# Altium PCB PCB1.PcbDoc
Units mil, origin at the board's own origin, x right, y up, seen from the top; angles counter-clockwise.
Board outline 10000 x 8000 mil, 2 copper layers (Top Layer, Bottom Layer); 40 components, 29 nets, 128 pads, 3 vias.
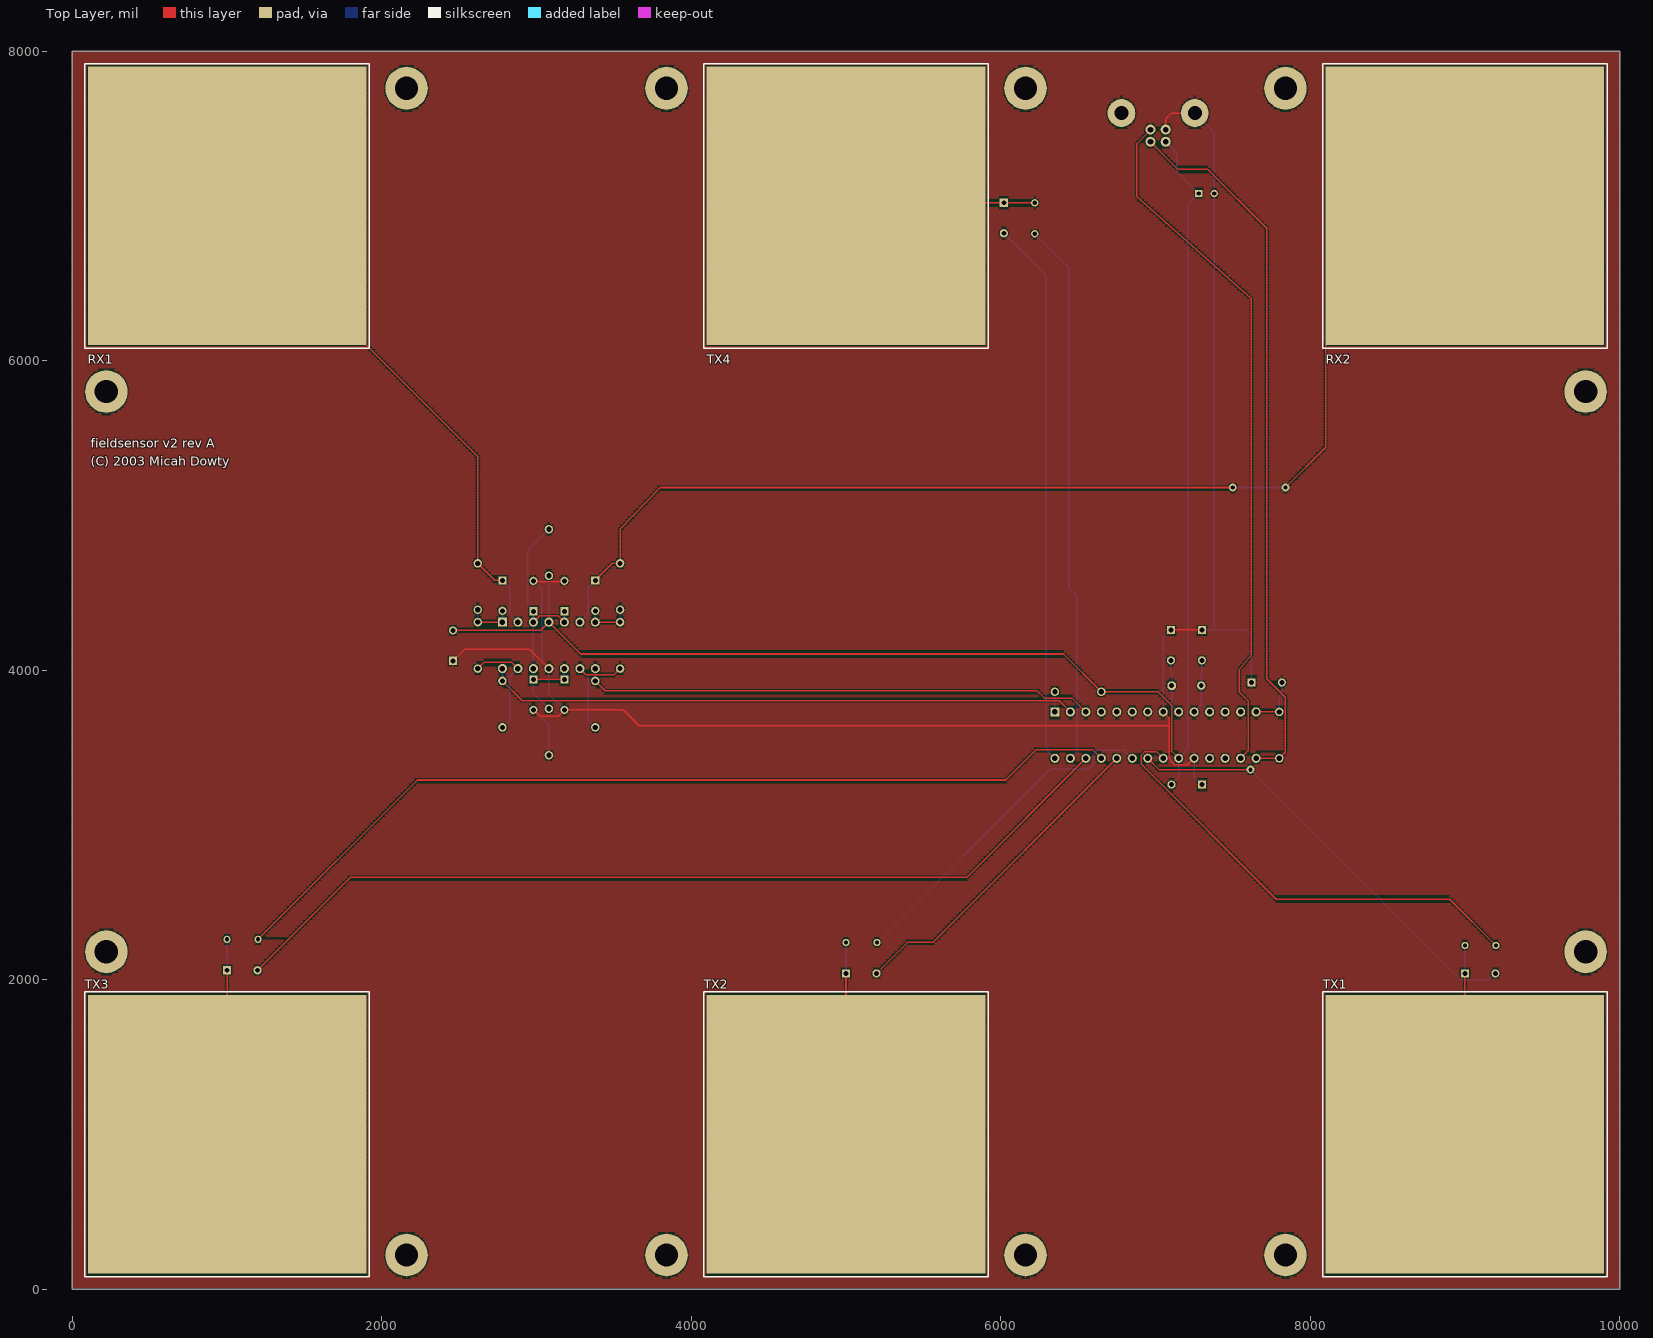
[diagram p0: Top Layer view]
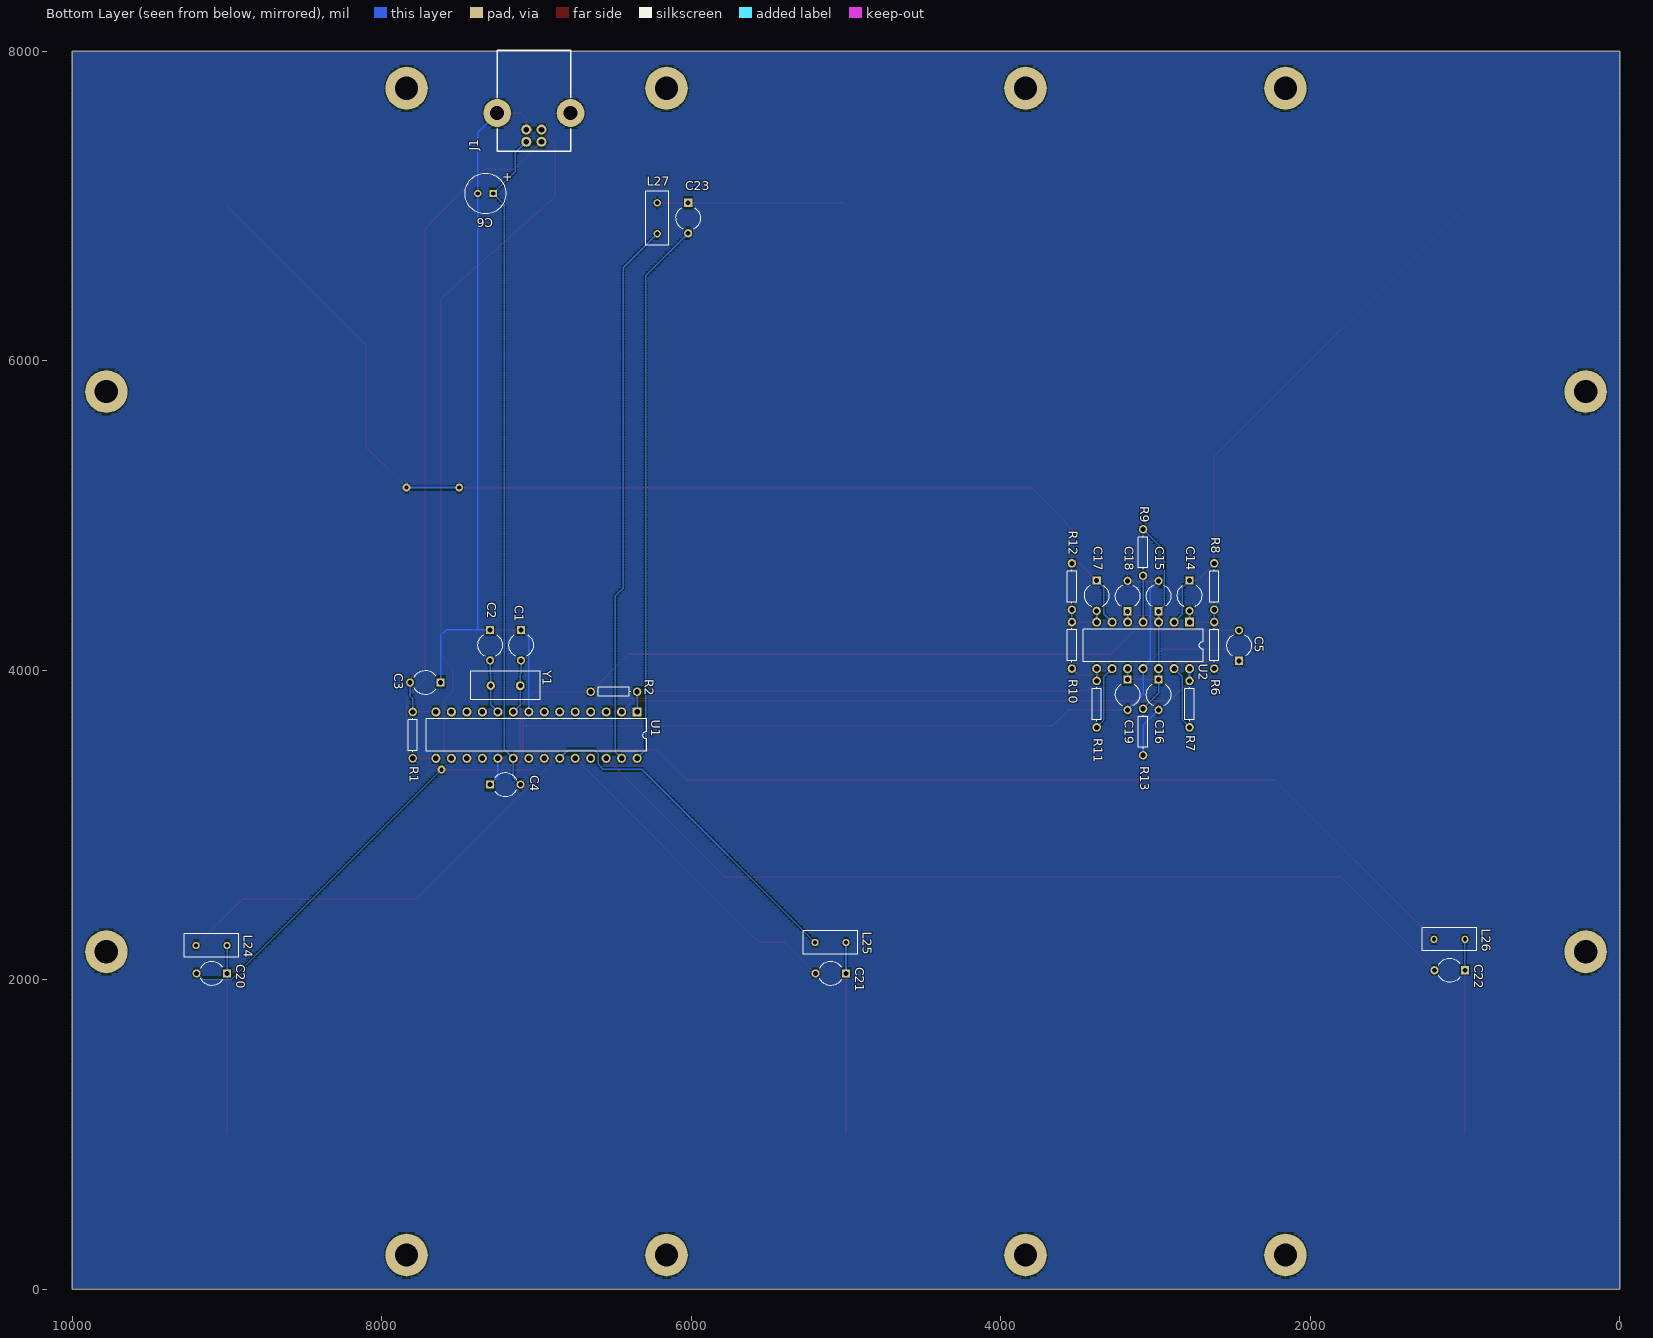
[diagram p1: Bottom Layer view, seen from below]

## Layer stack, top to bottom
Top Layer: signal copper 1.4
Dielectric: dielectric 12.6, FR-4, Dk 4.8
Bottom Layer: signal copper 1.4

## Board outline
0,0 10000,0 10000,8000 0,8000

## Design rules (kind name [scope] priority, off if disabled: settings)
Clearance [All] p1: gap=5
ComponentClearance [All] p1: gap=10 collisioncheckmode=0
PolygonConnect [All] p1: connectstyle=Relief reliefconductorwidth=10 reliefentries=4 polygonreliefangle="90 Angle"
RoomDefinition Sheet1 [InComponentClass('Sheet1')] p1: confinementstyle=ConfineIn formatcopy=TRUE outline 0,8000 10000,8000 10000,0 0,0
RoutingLayers [All] p1: top layer=Horizontal bottom layer=Vertical
RoutingVias [All] p1: holewidth=28 width=50 viastyle="Through Hole" minholewidth=28 minwidth=50 maxholewidth=28 maxwidth=50
SolderMaskExpansion [All] p1: expansion=4
TestPointUsage [All] p1: valid=0 allowmultiple=FALSE
Testpoint [All] p1: side=15 testpointundercomponent=TRUE minsize=40 maxsize=100 preferedsize=60 minholesize=0 maxholesize=40 preferedholesize=32 testpointgrid=1 style=1023 order=1234567890
Width [All] p1: maxlimit=30 minlimit=10 preferedwidth=10 minimp=50.000000 maximp=50.000000 favimp=50.000000
16 further rules are at their usual default settings.

## Components (designator, comment, footprint, x,y, rotation, side; value= is the part's Value field where it differs from the comment)
C1 "Cap2" CAPR5-4X5 7100,4260 r270 bottom
C2 "Cap2" CAPR5-4X5 7300,4260 r270 bottom
C3 "" CAPR5-4X5 7620,3920 r0 bottom
C4 "" CAPR5-4X5 7300,3260 r180 bottom
C5 "" CAPR5-4X5 2460,4060 r90 bottom
C6 "Cap Pol1" CAP-EE-1 7180,7080 r180 bottom
C14 "Cap2" CAPR5-4X5 2780,4580 r270 bottom
C15 "Cap2" CAPR5-4X5 2980,4380 r90 bottom
C16 "Cap2" CAPR5-4X5 2980,3940 r270 bottom (schematic designator C15)
C17 "Cap2" CAPR5-4X5 3380,4580 r270 bottom
C18 "Cap2" CAPR5-4X5 3180,4380 r90 bottom
C19 "Cap2" CAPR5-4X5 3180,3940 r270 bottom
C20 "Cap2" CAPR5-4X5 9000,2040 r0 bottom
C21 "Cap2" CAPR5-4X5 5000,2040 r0 bottom
C22 "Cap2" CAPR5-4X5 1000,2060 r0 bottom
C23 "Cap2" CAPR5-4X5 6020,7020 r270 bottom
J1 "USB Type B" USB-TYPEB 6780,7600 r0 bottom
L24 "" RAD-0.2 9200,2220 r180 bottom (schematic designator L1)
L25 "" RAD-0.2 5200,2240 r180 bottom
L26 "" RAD-0.2 1200,2260 r180 bottom
L27 "" RAD-0.2 6220,6820 r90 bottom
R1 "Res1" AXIAL-0.3 7800,3580 r270 bottom
R2 "Res1" AXIAL-0.3 6500,3860 r0 bottom
R6 "Res1" AXIAL-0.3 2620,4160 r270 bottom
R7 "Res1" AXIAL-0.3 2780,3780 r90 bottom
R8 "Res1" AXIAL-0.3 2620,4540 r270 bottom
R9 "Res1" AXIAL-0.3 3080,4760 r270 bottom
R10 "Res1" AXIAL-0.3 3540,4160 r270 bottom
R11 "Res1" AXIAL-0.3 3380,3780 r90 bottom
R12 "Res1" AXIAL-0.3 3540,4540 r270 bottom
R13 "Res1" AXIAL-0.3 3080,3600 r90 bottom (schematic designator R9)
RX1 "Antenna" FIELD_ANTENNA 1000,7000 r90 top
RX2 "Antenna" FIELD_ANTENNA 9000,7000 r90 top
TX1 "Antenna" FIELD_ANTENNA 9000,1000 r90 top
TX2 "Antenna" FIELD_ANTENNA 5000,1000 r90 top
TX3 "Antenna" FIELD_ANTENNA 1000,1000 r90 top
TX4 "Antenna" FIELD_ANTENNA 5000,7000 r90 top
U1 "PIC16C745" DIP-28 7000,3580 r0 bottom (schematic designator U?)
U2 "MAX475CPD" DIP-14/D19.7 3080,4160 r0 bottom
Y1 "6 MHz" BCY-W2/E4.7 7200,3900 r0 bottom

## Footprints (in the part's own frame and the unit in brackets; to place one, negate y for a bottom-side part, rotate by r counter-clockwise, add the part's x,y. Pads: shape width x height; smd on the part's side, far side on the other; paste and mask are expansions set on the pad)
AXIAL-0.3 [mm]
  round 1.4 hole 0.85: 1(-3.81,0) 2(3.81,0)
  silkscreen extent -2.77,-0.76 2.77,0.76
BCY-W2/E4.7 [mm]
  oct 1.4x1.4 hole 0.8: 1(-2.44,0)
  round 1.4 hole 0.8: 2(2.44,0)
  silkscreen extent -5.7,-2.35 5.7,2.35
CAP-EE-1 [mm]
  rect 1.2x1.2 hole 0.7: 1(-2.54,0)
  round 1.2 hole 0.7: 2(-5.08,0)
  silkscreen extent -7.15,-3.34 -0.47,3.34
CAPR5-4X5 [mm]
  rect 1.35x1.35 hole 0.8: 1(0,0)
  round 1.35 hole 0.8: 2(5,0)
  silkscreen extent 0.81,-2 4.32,2
DIP-14/D19.7 [mm]
  rect 1.5x1.5 hole 0.9: 1(-7.62,-3.81)
  round 1.5 hole 0.9: 2(-5.08,-3.81) 3(-2.54,-3.81) 4(0,-3.81) 5(2.54,-3.81) 6(5.08,-3.81) 7(7.62,-3.81) 8(7.62,3.81) 9(5.08,3.81) 10(2.54,3.81) 11(0,3.81) 12(-2.54,3.81) 13(-5.08,3.81) 14(-7.62,3.81)
  silkscreen extent -9.85,-2.65 9.85,2.65
DIP-28 [mm]
  rect 1.5x1.5 hole 0.9: 1(-16.51,-3.81)
  round 1.5 hole 0.9: 2(-13.97,-3.81) 3(-11.43,-3.81) 4(-8.89,-3.81) 5(-6.35,-3.81) 6(-3.81,-3.81) 7(-1.27,-3.81) 8(1.27,-3.81) 9(3.81,-3.81) 10(6.35,-3.81) 11(8.89,-3.81) 12(11.43,-3.81) 13(13.97,-3.81) 14(16.51,-3.81) 15(16.51,3.81) 16(13.97,3.81) 17(11.43,3.81) 18(8.89,3.81) 19(6.35,3.81) 20(3.81,3.81) 21(1.27,3.81) 22(-1.27,3.81) 23(-3.81,3.81) 24(-6.35,3.81) 25(-8.89,3.81) 26(-11.43,3.81) 27(-13.97,3.81) 28(-16.51,3.81)
  silkscreen extent -18.1,-2.65 18.1,2.65
FIELD_ANTENNA [mil]
  rect 1800x1800 smd: 1(0,0)
  silkscreen extent -920,-920 920,920
RAD-0.2 [mm]
  round 1.2 hole 0.7: 1(0,0) 2(5.08,0)
  silkscreen extent -1.91,-1.91 6.98,1.91
USB-TYPEB [mil]
  round 65 hole 36.22: 1(286.22,185.43) 2(187.8,185.43) 3(187.8,106.69) 4(286.22,106.69)
  round 180 hole 90.55: 5(0,0) 5(474.02,0)
  silkscreen extent 0,-406 474,248

## Part data
C1 C2 C14 C15 C16 C17 C18 C19 C20 C21 C22 C23: "Capacitor"
C3 C4 C5: library part Cap2, "Capacitor"
C6: "Polarized Capacitor (Radial)"
J1: "Header, 4-Pin"
L24 L25 L26 L27: library part Inductor, "Inductor"
R1 R2 R6 R7 R8 R9 R10 R11 R12 R13: "Resistor"
RX1 RX2 TX1 TX2 TX3 TX4: library part Socket, "Socket"
U1: "EPROM-Based 8-Bit CMOS Microcontroller with USB"
U2: "Quad 10MHz, Single Supply Operational Amplifier"
Y1: library part XTAL, "Crystal Oscillator"

## Free pads (board coordinates)
  round 275 hole 150: 1(220,2180) 1(220,5800) 1(2160,220) 1(2160,7760) 1(3840,220) 1(3840,7760) 1(6160,220) 1(6160,7760) 1(7840,220) 1(7840,7760) 1(9780,2180) 1(9780,5800)

## Via types
v1: diameter 50, hole 28, Top Layer to Bottom Layer, 3 vias

## Nets (pads, with @x,y where several pads share a name; then routed paths per layer and width w, separated by ;. In a path a pad name is that pad's centre, name@x,y a point inside that pad or via, vN(x,y) a via of type N, cw(c..) or ccw(c..) an arc to the next point about the centre after c; other vN are vias at no path point)
GND: C1.1 C2.1 C3.1 C4.1 C5.1 C6.2 C15.2 C16.2 C18.2 C19.2 J1.4 J1.5@7254.02,7600 pad.1 R13.1 U1.8 U1.19 U2.11 | length 12102.9
  Top Layer w10: C5.1 2534,4134 2956,4134 U2.11 ; C16.2 3020.15,3703 3139.85,3703 C19.2 3560.85,3743.15 3664,3640 7090,3640 ; C15.2 2985.85,4571 3174.15,4571 C18.2 ; U1.8 7090,3690 7090,3640 ; J1.4 7066.22,7562.22 7104,7600 J1.5@7254.02,7600 ; C1.1 C2.1 ; U1.19 7209,3389 7125,3389 7090,3424 7090,3640
  Bottom Layer w10: C16.2 3080,3643.15 R13.1 ; C15.2 3035,4521.85 3035,4055 U2.11 3080,3843.15 C19.2 ; U1.8 7050,4210 C1.1 ; U1.19 7250,3310 C4.1 ; J1.5@7254.02,7600 7380,7474.02 C6.2 7380,4260 ; C2.1 7380,4260 ; C3.1 7620,4224 7584,4260 7380,4260
NetC1_2: C1.2 U1.9 Y1.1 | length 353.9
  Bottom Layer w10: C1.2 7100,3982.94 7103.94,3979 Y1.1 7103.94,3776.06 U1.9
NetC2_2: C2.2 U1.10 Y1.2 | length 353.9
  Bottom Layer w10: U1.10 7296.06,3776.06 Y1.2 7296.06,3979 7300,3982.94 C2.2
NetC3_2: C3.2 R1.1 U1.14 | length 347
  Top Layer w10: U1.14 R1.1
  Bottom Layer w10: R1.1 7800,3816 7816.85,3832.85 C3.2
NetC14_1: C14.1 R8.1 RX1.1 U2.2 | length 3498
  Top Layer w10: RX1.1 2620,5380 R8.1 2730,4580 C14.1
  Bottom Layer w10: C14.1 2826,4534 2826,4364 U2.2
NetC14_2: C14.2 R6.1 R8.2 U2.1 | length 313.1
  Top Layer w10: R6.1 U2.1
  Bottom Layer w10: R6.1 R8.2 ; U2.1 C14.2
NetC15_1: C15.1 C16.1 C18.1 C19.1 R9.1 R13.2 U2.3 U2.5 U2.10 U2.12 | length 1847.5
  Top Layer w10: C16.1 C19.1 ; U2.3 3021,4351 3139,4351 U2.5
  Bottom Layer w10: R13.2 2980,3850 C16.1 U2.12 U2.3 C15.1 2943,4417 2943,4773 R9.1 ; C19.1 U2.10 ; U2.5 C18.1
NetC17_1: C17.1 R12.1 RX2.1 U2.6 | length 7452.3
  Top Layer w10: C17.1 3490,4690 R12.1 3540,4910 3800,5180 v1(7500,5180) ; v1(7840,5180) 8100,5440 8100,6100 RX2.1
  Bottom Layer w10: U2.6 3334,4364 3334,4534 C17.1 ; v1(7500,5180) v1(7840,5180)
NetC17_2: C17.2 R10.1 R12.2 U2.7 | length 313.1
  Top Layer w10: U2.7 R10.1
  Bottom Layer w10: U2.7 C17.2 ; R10.1 R12.2
NetC20_1: C20.1 L24.2 TX1.1 | length 1220
  Top Layer w10: TX1.1 C20.1
  Bottom Layer w10: C20.1 L24.2
NetC20_2: C20.2 U1.22 | length 2855.7
  Top Layer w10: U1.22 7023,3357 v1(7614,3357)
  Bottom Layer w10: v1(7614,3357) 8971,2000 9156.85,2000 C20.2
NetC21_1: C21.1 L25.2 TX2.1 | length 1240
  Top Layer w10: TX2.1 C21.1
  Bottom Layer w10: C21.1 L25.2
NetC21_2: C21.2 U1.24 | length 2128.9
  Top Layer w10: C21.2 5396.85,2240 5560,2240 U1.24
NetC22_1: C22.1 L26.2 TX3.1 | length 1260
  Top Layer w10: TX3.1 C22.1
  Bottom Layer w10: C22.1 L26.2
NetC22_2: C22.2 U1.26 | length 5920.6
  Top Layer w10: C22.2 1796.85,2660 5780,2660 U1.26
NetC23_1: C23.1 L27.2 TX4.1 | length 1228.3
  Top Layer w10: TX4.1 5020,7020 C23.1 L27.2
NetC23_2: C23.2 U1.28 | length 3529.8
  Bottom Layer w10: C23.2 6295,6548.15 6295,3485 U1.28
NetJ1_2: J1.2 R1.2 U1.15 | length 4623.8
  Top Layer w10: J1.2 7146.36,7236 7338,7236 7719,6855 7719,3944 7839,3824 7839,3469 R1.2 U1.15
NetJ1_3: J1.3 U1.16 | length 4503.3
  Top Layer w10: J1.3 6880,7400 6880,7060 7620,6400 7620,4100 7540,4000 7540,3860 7600,3800 7600,3480 U1.16
NetL24_1: L24.1 U1.21 | length 3002.3
  Top Layer w10: U1.21 7009,3471 6929,3471 6909,3451 6909,3391 7781,2519 8901,2519 L24.1
NetL25_1: L25.1 U1.23 | length 2224.7
  Bottom Layer w10: L25.1 6320,3360 6568,3360 6600,3392 6600,3458 6624,3482 6798,3482 U1.23
NetL26_1: L26.1 U1.25 | length 5979.4
  Top Layer w10: L26.1 2230,3290 6032,3290 6226,3484 6596,3484 U1.25
NetL27_1: L27.1 U1.27 | length 3519.2
  Bottom Layer w10: L27.1 6440,6600 6440,4530 6491,4479 6491,3471 U1.27
NetR2_1: R2.1 U1.1 | length 130
  Bottom Layer w10: U1.1 R2.1
NetR6_2: R6.2 R7.1 U2.13 | length 715.4
  Top Layer w10: R6.2 2661,4051 2839,4051 U2.13
  Bottom Layer w10: R7.1 2827,3677 2827,3957 U2.13
NetR7_2: R7.2 U1.2 U2.14 | length 3832.8
  Top Layer w10: R7.2 2908,3802 6378,3802 U1.2
  Bottom Layer w10: R7.2 U2.14
NetR10_2: R10.2 R11.1 U2.9 | length 715.4
  Top Layer w10: U2.9 3321,3969 3499,3969 R10.2
  Bottom Layer w10: U2.9 3333,3957 3333,3677 R11.1
NetR11_2: R11.2 U1.3 U2.8 | length 3332.8
  Top Layer w10: R11.2 3444,3866 6235,3866 6282,3819 6461,3819 U1.3
  Bottom Layer w10: R11.2 U2.8
VCC: C4.2 C5.2 C6.1 J1.1 R2.2 R9.2 U1.20 U2.4 | length 9866.3
  Top Layer w10: C5.2 3026.85,4256.85 U2.4 3286,4104 6406,4104 R2.2 7016,3860 7106,3770 7106,3474 U1.20
  Bottom Layer w10: U2.4 R9.2 ; J1.1 7138,7342.79 7138,7222 C6.1 7209,7009 7209,3489 U1.20 7150,3306.85 C4.2
pads on no net: J1.5@6780,7600 U1.4 U1.5 U1.6 U1.7 U1.11 U1.12 U1.13 U1.17 U1.18
copper on no net: | length 19.2
  Top Layer w10: 7066.22,7414.57 7085.43,7414.57

## Polygon pours and split planes (outlines as drawn)
GND on Top Layer (hatched Horizontal grid 18 track 20, remove dead copper): 0,8000 10000,8000 10000,0 0,0
GND on Bottom Layer (hatched Horizontal grid 18 track 20, remove dead copper): 0,8000 10000,8000 10000,0 0,0

## Silkscreen, mask and mechanical layers (free items; w line width, h text height)
Top Overlay:
  text "fieldsensor v2 rev A" at 120,5436 h60
  text "(C) 2003 Micah Dowty" at 120,5320 h60
Mechanical 1:
  the board outline again, w10

## Text inside footprints (layer, text, board x,y; h text height)
C6: Bottom Overlay "+" at 7220,7160 h59.06